# Altium PCB PCB1.PcbDoc
Units mm, origin at the board's own origin, x right, y up, seen from the top; angles counter-clockwise.
Board outline 154.3 x 128.7 mm, 2 copper layers (Top Layer, Bottom Layer); 16 components, 24 nets, 160 pads, 8 vias.
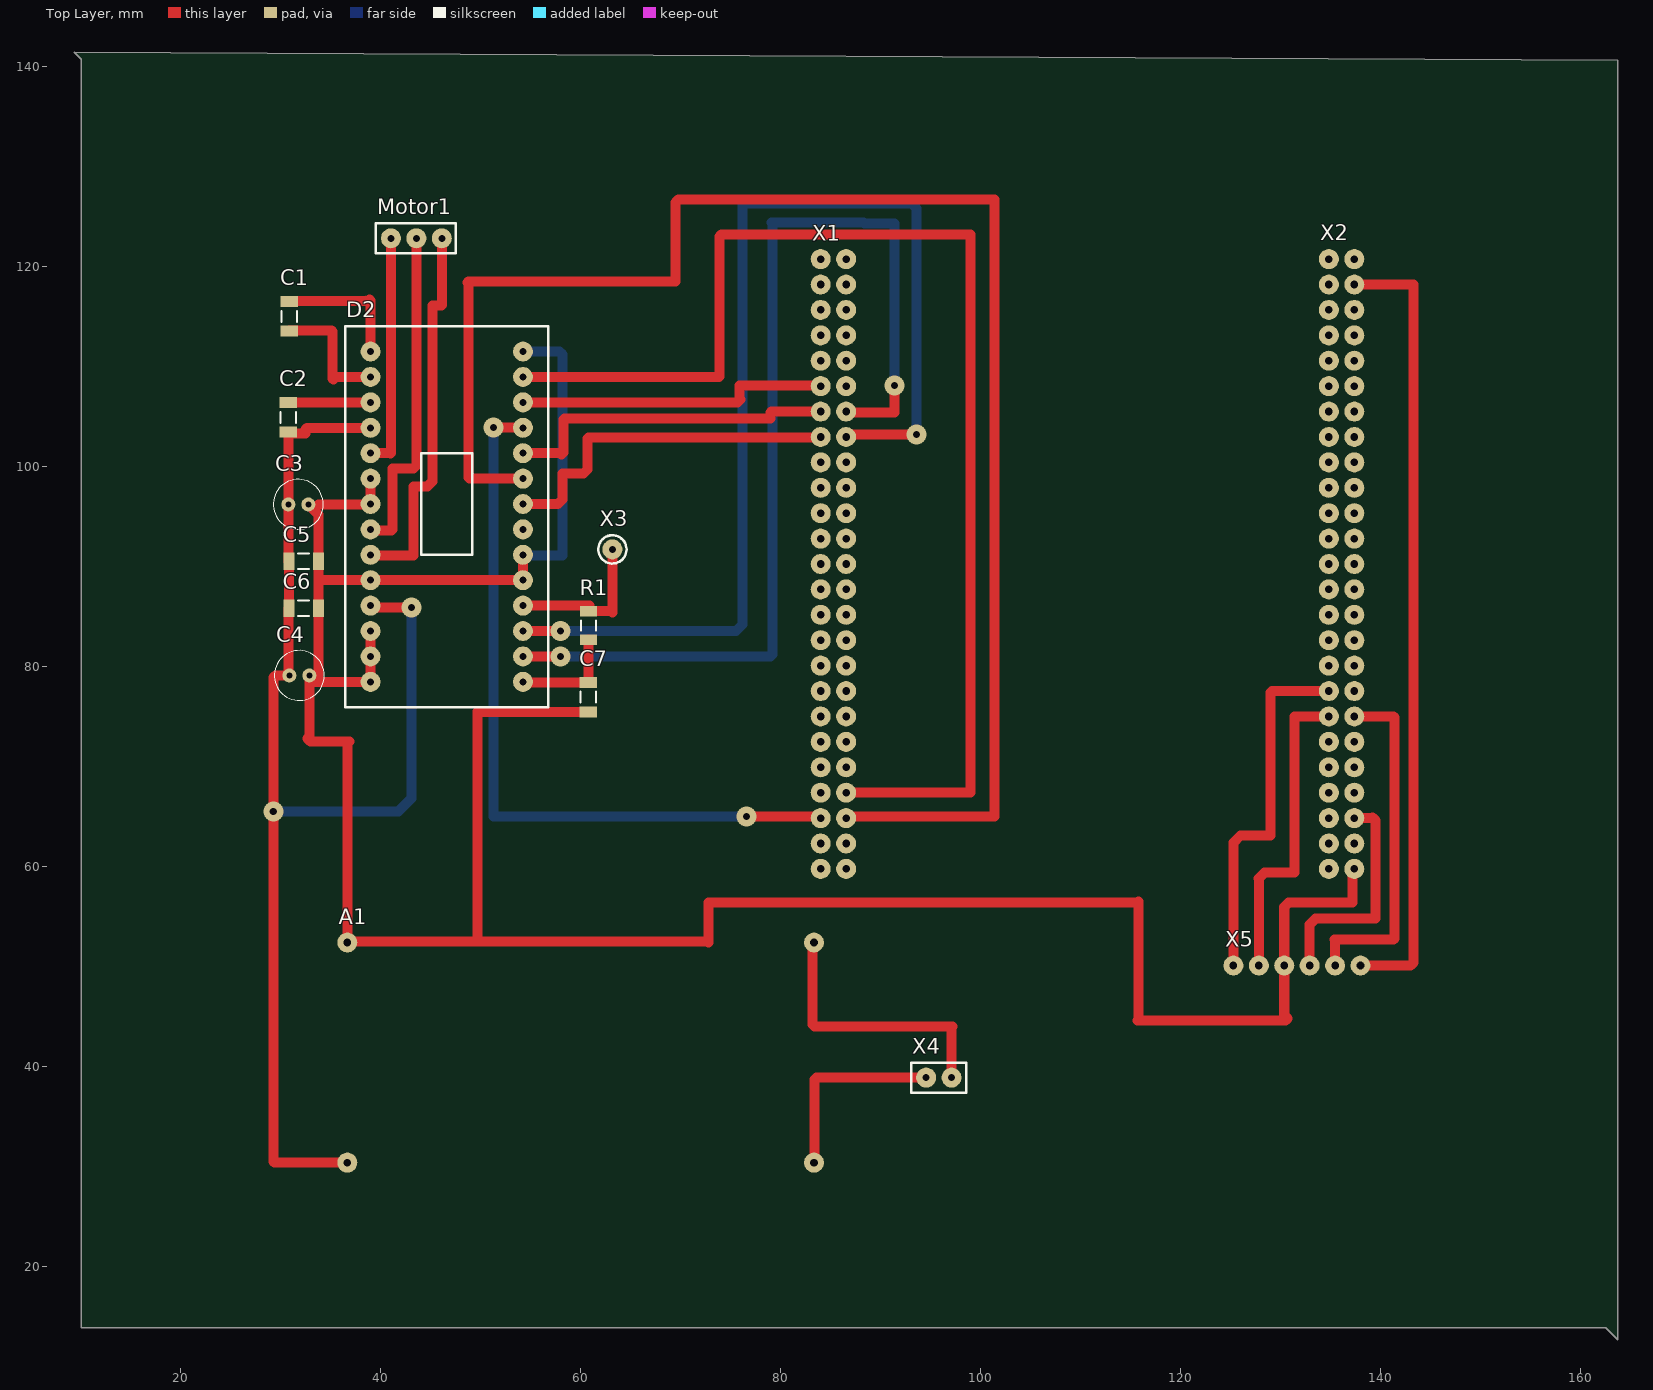
[diagram p0: Top Layer view]
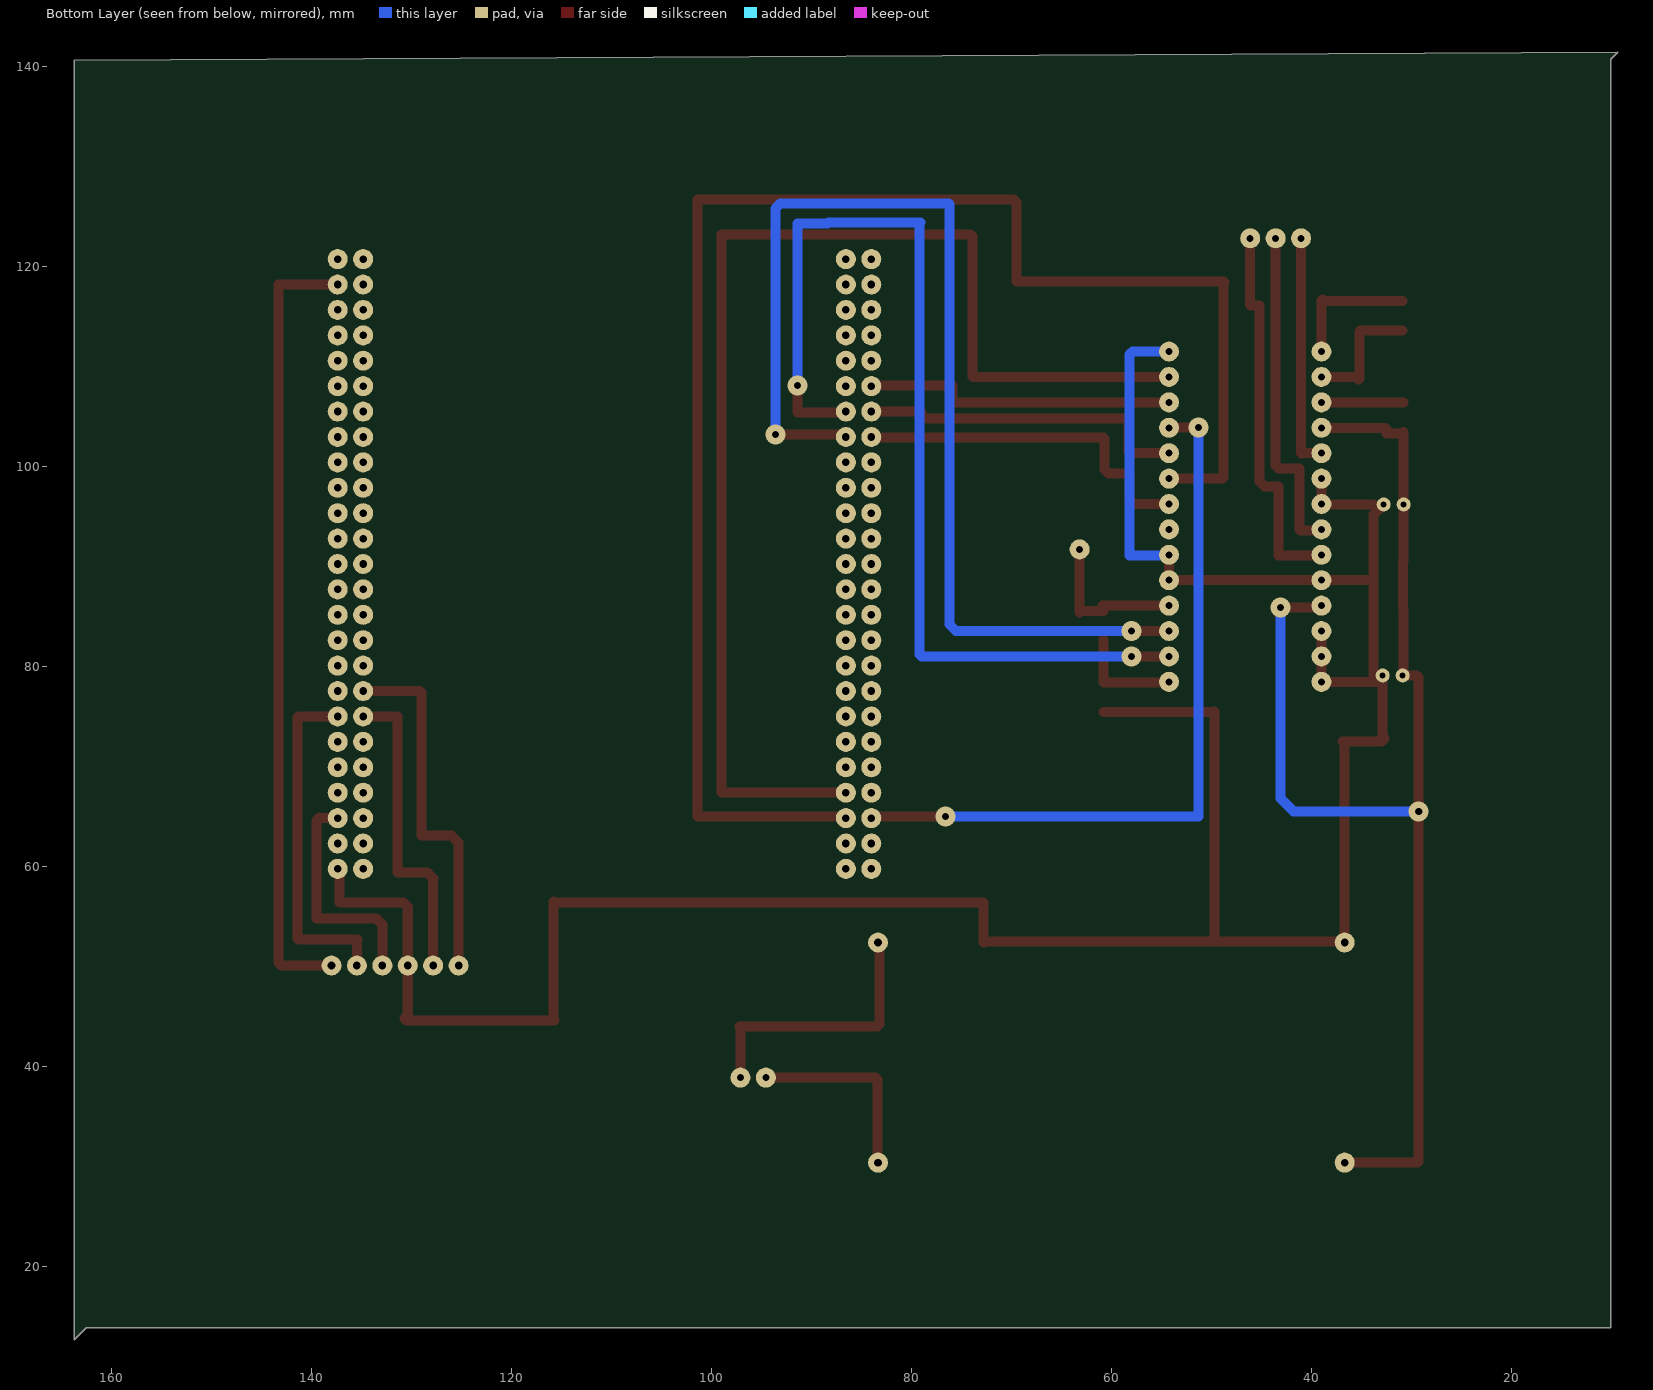
[diagram p1: Bottom Layer view, seen from below]

## Layer stack, top to bottom
Top Solder: solder mask 0.0102, Solder Resist, Dk 3.5
Top Layer: signal copper 0.0356
Dielectric 1: dielectric 0.32, FR-4, Dk 4.8
Bottom Layer: signal copper 0.0356
Bottom Solder: solder mask 0.0102, Solder Resist, Dk 3.5

## Board outline
9.4,141.4 10.1,140.7 10.1,13.9 162.5,13.9 163.7,12.7 163.7,140.6

## Design rules (kind name [scope] priority, off if disabled: settings)
Clearance [All] p1: gap=0.254 ignorepadtopadclearanceinfootprint=FALSE except(0: Arc-Hole Track-Hole SMDPad-Hole THPad-Hole Via-Hole Fill-Hole Poly-Hole Region-Hole Text-Hole)
PolygonConnect [All] p1: connectstyle=Relief reliefconductorwidth=0.254 reliefentries=4 polygonreliefangle="90 Angle" airgapwidth=0.254
RoutingVias [All] p1: holewidth=0.711 width=1.27 viastyle="Through Hole" minholewidth=0.711 minwidth=1.27 maxholewidth=0.711 maxwidth=1.27
SolderMaskExpansion [All] p1: expansion=0.102
Width [All] p1: maxlimit=1 minlimit=0.254 preferedwidth=0.254 minimp=50.000000 maximp=50.000000 favimp=50.000000
30 further rules are at their usual default settings.

## Components (designator, comment, footprint, x,y, rotation, side; value= is the part's Value field where it differs from the comment)
A1 "XL4050" XL4050_PCB 83.35,30.4 r180 top
C1 "0.01uF" "Ceramic 1206 - duplicate" 30.9,115 r270 top
C2 "0.1uF" "Ceramic 1206 - duplicate" 30.8,104.9 r270 top
C3 "100uF/16V" "CAP 50-35 5х11" 30.8,96.2 r0 top
C4 "10uF/16V" "CAP 50-35 5х11" 30.9,79.1 r0 top
C5 "0.1uF" "Ceramic 1206 - duplicate" 32.325,90.5 r0 top
C6 "0.1uF" "Ceramic 1206 - duplicate" 32.325,85.8 r0 top
C7 "0.47uF" "Ceramic 1206 - duplicate" 60.8,76.925 r270 top
D2 "*" "DRV8313 board" 39.02,111.48 r0 top
Motor1 "Motor" "Fhase out" 41.06,122.8 r0 top
R1 "10kOhm" "Resistor 1206" 60.8,84.1 r90 top
X1 "*" STM32F4Discovery_P 84.02,120.72 r0 top
X2 "*" STM32F4Discovery_P 134.82,120.72 r0 top
X3 "Signal port" "Signal port" 63.2,91.7 r90 top
X4 "*" "Power input" 94.56,38.9 r0 top
X5 "AS5048A" AS5048A_input 137.98,50.1 r270 top

## Footprints (in the part's own frame and the unit in brackets; to place one, negate y for a bottom-side part, rotate by r counter-clockwise, add the part's x,y. Pads: shape width x height; smd on the part's side, far side on the other; paste and mask are expansions set on the pad)
AS5048A_input [mm]
  round 2 hole 0.762: 1(0,0) 2(0,-2.54) 3(0,-5.08) 4(0,-7.62) 5(0,-10.16) 6(0,-12.7)
"CAP 50-35 5х11" [mm]
  round 1.4 hole 0.6: 1(0,0) 2(2,0)
  silkscreen extent -1.5,-2.5 3.5,2.5
"Ceramic 1206 - duplicate" [mm] "Chip Capacitor, 2-Leads, Body 3,20x1,60mm, IPC Medium Density"
  rect 1.1x1.75 smd: 1(-1.475,0) 2(1.475,0)
  silkscreen extent -0.55,-0.77 0.55,0.77, body extent -1.6,-0.8 1.6,0.8, height 1.53
"DRV8313 board" [mm]
  round 2 hole 0.7: 1(0,0) 2(0,-2.54) 3(0,-5.08) 4(0,-7.62) 5(0,-10.16) 6(0,-12.7) 7(0,-15.24) 8(0,-17.78) 9(0,-20.32) 10(0,-22.86) 11(0,-25.4) 12(0,-27.94) 13(0,-30.48) 14(0,-33.02) 15(15.24,-33.02) 16(15.24,-30.48) 17(15.24,-27.94) 18(15.24,-25.4) 19(15.24,-22.86) 20(15.24,-20.32) 21(15.24,-17.78) 22(15.24,-15.24) 23(15.24,-12.7) 24(15.24,-10.16) 25(15.24,-7.62) 26(15.24,-5.08) 27(15.24,-2.54) 28(15.24,0)
  silkscreen extent -2.54,-35.56 17.78,2.54
"Fhase out" [mm]
  round 2 hole 0.7: 1(0,0) 2(2.54,0) 3(5.08,0)
  silkscreen extent -1.5,-1.5 6.5,1.5
"Power input" [mm]
  round 2 hole 0.7: 1(0,0) 2(2.54,0)
  silkscreen extent -1.5,-1.5 4,1.5
"Resistor 1206" [mm] "Chip Resistor, 2-Leads, Body 3,10x1,60mm, IPC Medium Density"
  rect 1.05x1.7 smd: 1(-1.425,0) 2(1.425,0)
  silkscreen extent -0.5,-0.75 0.5,0.75, body extent -1.6,-0.85 1.6,0.85, height 0.6
"Signal port" [mm]
  round 2 hole 0.7: 1(0,0)
  silkscreen extent -1.41,-1.41 1.41,1.41
STM32F4Discovery_P [mm]
  round 2 hole 0.762: 1(0,0) 2(2.54,0) 3(0,-2.54) 4(2.54,-2.54) 5(0,-5.08) 6(2.54,-5.08) 7(0,-7.62) 8(2.54,-7.62) 9(0,-10.16) 10(2.54,-10.16) 11(0,-12.7) 12(2.54,-12.7) 13(0,-15.24) 14(2.54,-15.24) 15(0,-17.78) 16(2.54,-17.78) 17(0,-20.32) 18(2.54,-20.32) 19(0,-22.86) 20(2.54,-22.86) 21(0,-25.4) 22(2.54,-25.4) 23(0,-27.94) 24(2.54,-27.94) 25(0,-30.48) 26(2.54,-30.48) 27(0,-33.02) 28(2.54,-33.02) 29(0,-35.56) 30(2.54,-35.56) 31(0,-38.1) 32(2.54,-38.1) 33(0,-40.64) 34(2.54,-40.64) 35(0,-43.18) 36(2.54,-43.18) 37(0,-45.72) 38(2.54,-45.72) 39(0,-48.26) 40(2.54,-48.26) 41(0,-50.8) 42(2.54,-50.8) 43(0,-53.34) 44(2.54,-53.34) 45(0,-55.88) 46(2.54,-55.88) 47(0,-58.42) 48(2.54,-58.42) 49(0,-60.96) 50(2.54,-60.96)
XL4050_PCB [mm]
  round 2 hole 0.762: 1(0,0) 2(0,-22) 3(46.65,0) 4(46.65,-22)

## Part data
A1: library part XL4050_PCB
C1 C2 C5 C6 C7: library part "Ceramic capacitor 1206"
C3: library part "Elecrolite, К50-35, 100uF/16V"
C4: library part "Electrolite, K50-35, 10uF/63V"
D2: library part DRV8313
Motor1: library part "Fhase out"
R1: library part Resistor
X1: library part STM32F4_Discovery_P1
X2: library part STM32F4_Discovery_P2
X4: library part "Power input"
X5: library part AS5048A_PCB

## Via types
v1: diameter 2, hole 0.711, Top Layer to Bottom Layer, 8 vias

## Nets (pads, with @x,y where several pads share a name; then routed paths per layer and width w, separated by ;. In a path a pad name is that pad's centre, name@x,y a point inside that pad or via, vN(x,y) a via of type N, cw(c..) or ccw(c..) an arc to the next point about the centre after c; other vN are vias at no path point)
8-36V: A1.1 X4.1 | length 19.6
  Top Layer w1: A1.1 83.4,30.45 83.4,38.7 83.6,38.9 X4.1
12V: A1.3 C2.2 C3.1 C4.1 C5.1 C6.1 D2.4 D2.11 | length 128.2
  Top Layer w1: C6.1@30.8,85.8 30.8,79.2 C4.1 29.5,79.1 29.3,78.9 v1(29.3,65.5) 29.3,30.5 29.4,30.4 A1.3 ; C5.1@30.8,90.5 C3.1 C2.2 30.925,103.3 32.5,103.3 32.5,103.7 32.66,103.86 D2.4 ; C6.1 C5.1 ; D2.11 39.2,85.9 v1(43.1,85.9)
  Bottom Layer w1: v1(29.3,65.5) 41.8,65.5 43.1,66.8 v1(43.1,85.9)
+5V: X2.4 X5.1 | length 79.2
  Top Layer w1: X2.4 137.38,118.2 143.3,118.2 143.3,50.4 143,50.1 X5.1
CS: X2.46 X5.3 | length 23
  Top Layer w1: X5.3 132.9,54.2 133.5,54.8 139.5,54.8 139.5,64.6 139.2,64.9 139.14,64.84 X2.46
EN1: D2.26 X1.11 | length 31.5
  Top Layer w1: D2.26 75.7,106.4 76,106.7 75.9,106.8 75.9,108.1 83.94,108.1 X1.11
EN2: D2.24 X1.13 | length 33.9
  Top Layer w1: D2.24 57.98,101.32 58.1,101.2 58.3,101.4 58.3,104.7 58.4,104.8 79,104.8 79,105.4 79.1,105.5 84,105.5 X1.13
EN3: D2.22 X1.15 | length 35.9
  Top Layer w1: D2.22 57.74,96.24 58.2,96.7 58.2,99.3 60.3,99.3 60.7,99.7 60.7,102.8 60.8,102.9 83.98,102.9 X1.15
GND: A1.2 A1.4 C3.2 C4.2 C5.2 C6.2 C7.2 D2.6 D2.7 D2.10 D2.12 D2.13 D2.14 D2.19 D2.20 D2.28 X2.50 X4.2 X5.4 | length 313.4
  Top Layer w1: C3.2 33.8,95.2 C5.2 33.8,88.7 ; 33.8,96.2 38.98,96.2 D2.7 D2.6 ; D2.12 D2.13 D2.14 33.54,78.46 C4.2 ; D2.20 D2.19 D2.10 33.88,88.62 33.8,88.7 ; C7.2 49.75,75.45 49.7,75.5 49.7,52.8 49.4,52.5 ; A1.2 83.2,52.25 83.2,44.2 83.4,44 97.2,44 97.1,43.9 X4.2 ; X2.50 137.2,59.6 137.2,56.4 130.8,56.4 130.36,55.96 X5.4 130.36,45.14 130.7,44.8 130.5,44.6 115.7,44.6 115.8,44.7 115.8,56.5 115.7,56.4 72.8,56.4 72.8,52.4 72.7,52.5 49.4,52.5 ; C4.2 32.9,73 32.7,72.8 33,72.5 36.9,72.5 36.7,72.3 A1.4 36.8,52.5 49.4,52.5 ; C4.2 33.7,79.1 33.8,79.2 C6.2 33.8,88.7
  Bottom Layer w1: D2.20 54.32,91.1 58.2,91.1 58.2,111.2 57.92,111.48 D2.28
IN1: D2.27 X1.44 | length 127.1
  Top Layer w1: D2.27 73.84,108.94 73.9,109 73.9,123 74.1,123.2 99,123.2 99,67.38 X1.44
IN2: D2.25 X1.45 | length 74.9
  Top Layer w1: v1(51.3,103.9) 54.22,103.9 D2.25 ; v1(76.6,65) 83.86,65 X1.45
  Bottom Layer w1: v1@51.34,103.86 v1(51.3,103.9) 51.3,65 v1(76.6,65) ; X1.45@83.86,65 X1.45
IN3: D2.23 X1.46 | length 162.4
  Top Layer w1: D2.23 48.92,98.78 48.8,98.9 48.8,118.3 48.7,118.4 48.8,118.5 69.5,118.5 69.5,126.4 69.8,126.7 101.4,126.7 101.4,65 86.72,65 X1.46
MISO: X2.38 X5.2 | length 34.8
  Top Layer w1: X5.2 135.44,52.66 135.4,52.7 141.3,52.7 141.4,52.8 141.4,74.9 141.3,75 X2.38
MOSI: X2.35 X5.6 | length 36.5
  Top Layer w1: X5.6 125.28,62.38 126,63.1 129,63.1 129,77.4 129.14,77.54 X2.35
NetC1_1: C1.1 D2.1 | length 13.3
  Top Layer w1: C1.1@30.9,116.55 38.75,116.55 38.9,116.7 39.02,116.58 D2.1
NetC1_2: C1.2 D2.2 | length 13
  Top Layer w1: C1.2@30.9,113.6 35.1,113.6 35.2,113.5 35.2,108.8 35.3,108.7 35.54,108.94 D2.2
NetC2_1: C2.1 D2.3 | length 8.2
  Top Layer w1: C2.1 30.825,106.4 D2.3
nFAULT: D2.18 R1.2 X3.1 | length 16
  Top Layer w1: D2.18 60.88,86.08 60.9,86.1 60.9,85.625 R1.2 63.075,85.525 63.2,85.4 X3.1
nReset: D2.16 X1.14 | length 104.5
  Top Layer w1: D2.16 v1(58,81) ; X1.14 86.64,105.4 91.4,105.4 v1(91.4,108.1)
  Bottom Layer w1: v1(58,81) 79,81 79.2,81.2 79.2,124.3 79.1,124.4 88.3,124.4 88.4,124.3 91.4,124.3 v1(91.4,108.1) ; X1.14 X1.14@86.64,105.4
nSleep: D2.17 X1.16 | length 111.7
  Top Layer w1: D2.17 v1(58,83.54) ; X1.16 86.82,103.2 v1(93.6,103.2)
  Bottom Layer w1: v1(58,83.54) 75.54,83.54 76.2,84.2 76.2,126.2 76.3,126.3 93.1,126.3 93.6,125.8 v1(93.6,103.2) v1@93.6,103.1
OUT1: D2.5 Motor1.1 | length 23.5
  Top Layer w1: D2.5 40.98,101.32 41,101.3 41.06,101.36 Motor1.1
OUT2: D2.8 Motor1.2 | length 33.6
  Top Layer w1: D2.8 39.12,93.6 41.1,93.6 41.2,93.7 41.2,99.8 43.3,99.8 43.6,100.1 Motor1.2
OUT3: D2.9 Motor1.3 | length 38.5
  Top Layer w1: D2.9 39.08,91.1 43.3,91.1 43.3,98 44.7,98 45.2,98.5 45.2,116.1 46.1,116.1 46.14,116.14 Motor1.3
SCLK: X2.37 X5.5 | length 31.6
  Top Layer w1: X5.5 127.82,58.78 127.8,58.8 128.4,59.4 131.4,59.4 131.4,75 X2.37
V3P3: C7.1 D2.15 R1.1 | length 10.8
  Top Layer w1: D2.15 54.32,78.4 C7.1 R1.1
pads on no net: D2.21 X1.1 X1.2 X1.3 X1.4 X1.5 X1.6 X1.7 X1.8 X1.9 X1.10 X1.12 X1.17 X1.18 X1.19 X1.20 X1.21 X1.22 X1.23 X1.24 X1.25 X1.26 X1.27 X1.28 X1.29 X1.30 X1.31 X1.32 X1.33 X1.34 X1.35 X1.36 X1.37 X1.38 X1.39 X1.40 X1.41 X1.42 X1.43 X1.47 X1.48 X1.49 X1.50 X2.1 X2.2 X2.3 X2.5 X2.6 X2.7 X2.8 X2.9 X2.10 X2.11 X2.12 X2.13 X2.14 X2.15 X2.16 X2.17 X2.18 X2.19 X2.20 X2.21 X2.22 X2.23 X2.24 X2.25 X2.26 X2.27 X2.28 X2.29 X2.30 X2.31 X2.32 X2.33 X2.34 X2.36 X2.39 X2.40 X2.41 X2.42 X2.43 X2.44 X2.45 X2.47 X2.48 X2.49

## Panel: embedded boards
"PCB1.PcbDoc" at 231.8,123.5, 1 rows x 1 columns, spacing 0 x 0, rotation 0